# EAGLE board Keyboard (EAGLE 9.4.2)
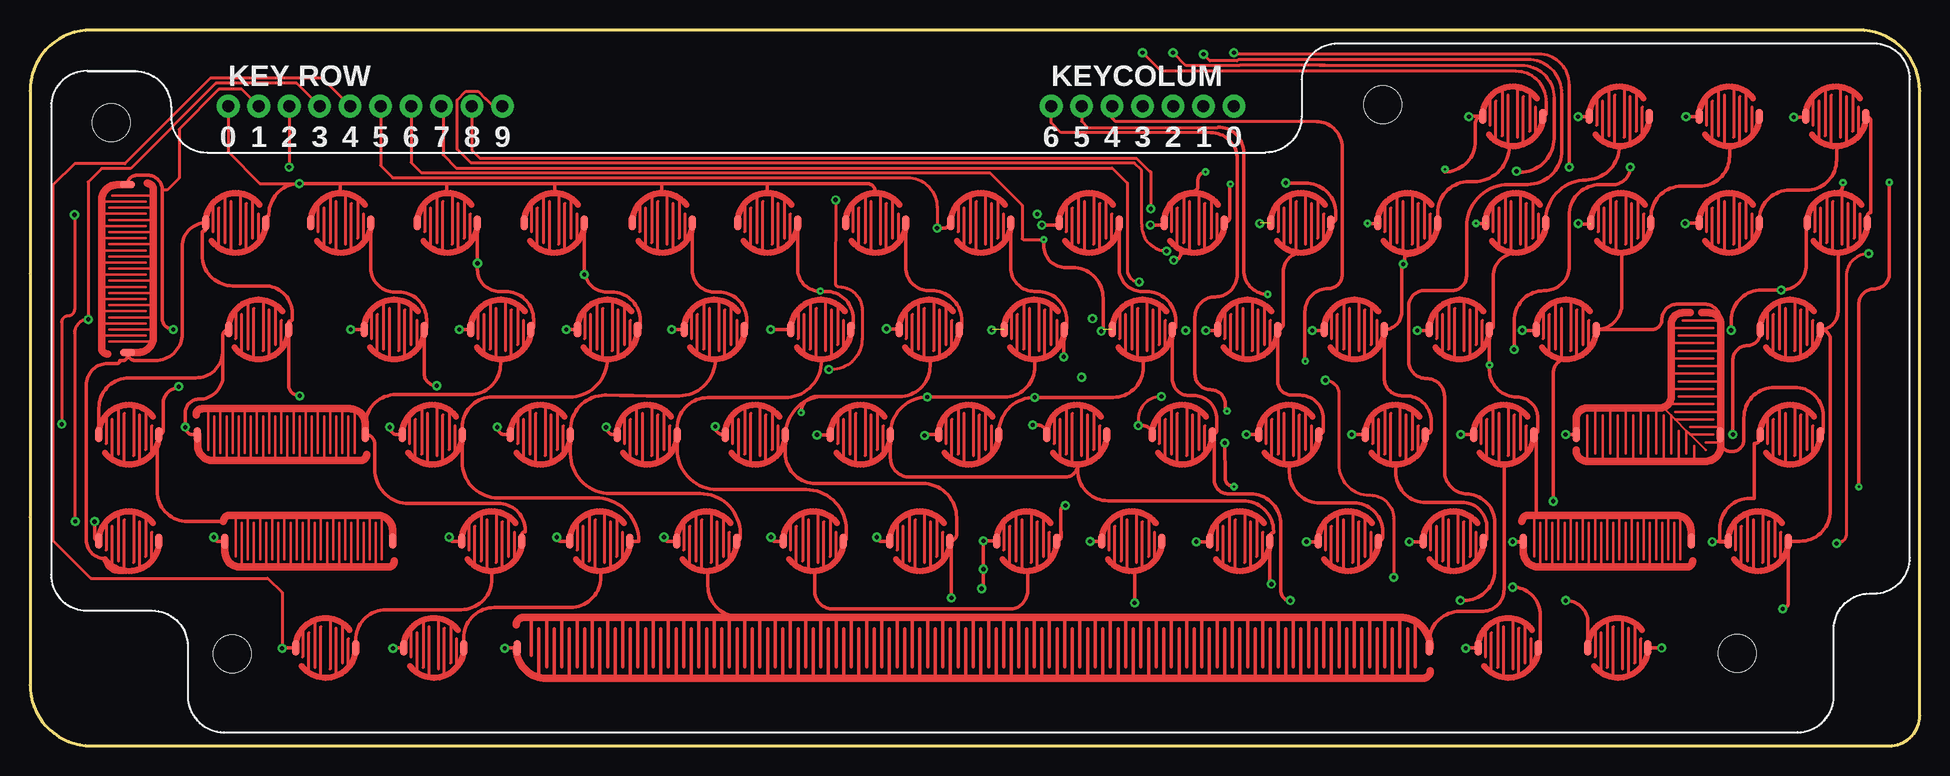
[diagram p0: board, top side]
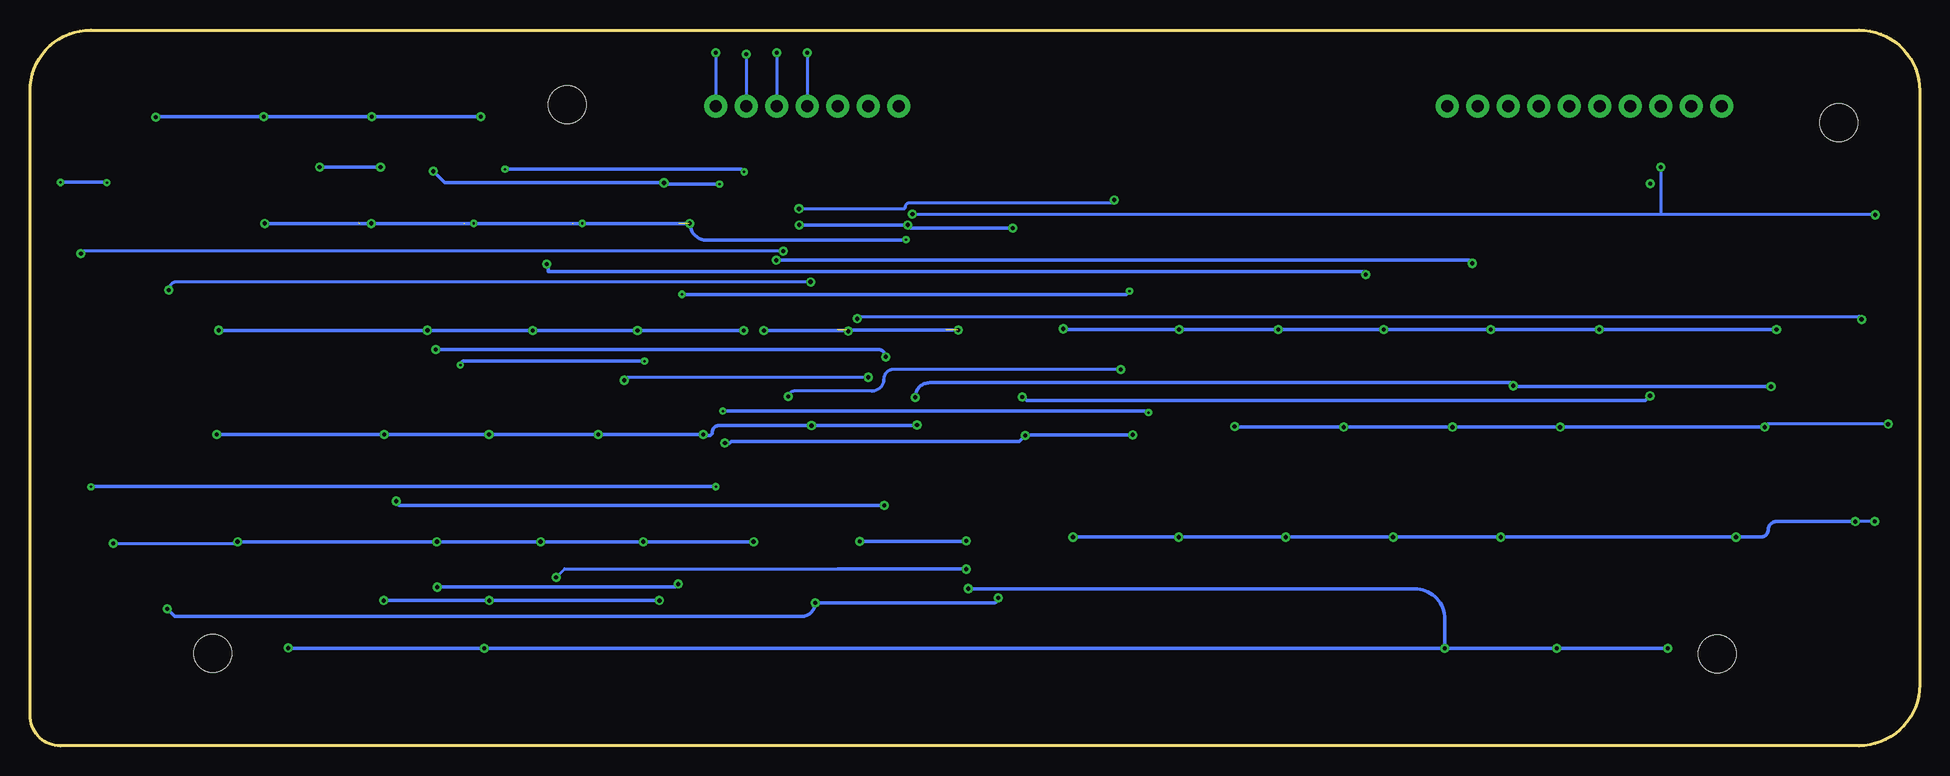
[diagram p1: board, bottom side, seen from below]

Size 157.48 x 59.69 mm. Coordinates in mm from the lower left corner, seen from the top.
Outline: 0,19.05 0,5.08 arc90 5.08,0 154.94,0 arc90 157.48,2.54 157.48,54.61 arc90 152.4,59.69 5.08,59.69 arc90 0,54.61 0,39.37 0,19.05
Copper layers (1*16): Top 0.035mm / dielectric 1.5mm / Bottom 0.035mm
Design rules "default": minimum track width 6mil, minimum drill 0.35mm, track to track 6mil, track to pad 6mil, pad to pad 6mil, via to via 6mil, smd to smd 6mil, copper to edge 40mil, drill to drill 6mil, minimum pad ring 10mil, minimum via ring 8mil, stop-mask expansion 4mil, vias tented up to drill 0mil, thermal gap 10mil
Holes 3.15 mm at 112.72,53.48 142.26,7.7 16.87,7.69 6.75,51.98

## Footprints (pad centres in the part's own frame; a part is rotated, then mirrored left to right if it is on the bottom)
SILICONE_SWITCH = smd 0.635 x 1.27: P$1 -2.5,0; P$2 2.5,0
SILICONE_SWITCH_2U = smd 0.635 x 1.27: P$1 -7,0; P$2 7,0
SILICONE_RETURN = smd 0.635 x 1.27: P$1 -6,0; P$2 6,0
SILICONE_SPACE = smd 0.635 x 1.27: P$1 -38,0; P$2 38,0

## Placement (x,y rotation side)
K-1  1U_PAD  [SILICONE_SWITCH]  25.9,43.6 0 top
K-2  1U_PAD  [SILICONE_SWITCH]  34.79,43.6 0 top
K-5  1U_PAD  [SILICONE_SWITCH]  61.46,43.6 0 top
K_0  1U_PAD  [SILICONE_SWITCH]  105.91,43.6 0 top
K_3  1U_PAD  [SILICONE_SWITCH]  43.68,43.6 0 top
K_4  1U_PAD  [SILICONE_SWITCH]  52.7,43.6 0 top
K_6  1U_PAD  [SILICONE_SWITCH]  70.48,43.6 0 top
K_7  1U_PAD  [SILICONE_SWITCH]  79.24,43.6 0 top
K_8  1U_PAD  [SILICONE_SWITCH]  88.26,43.6 0 top
K_9  1U_PAD  [SILICONE_SWITCH]  97.02,43.6 0 top
K_<  1U_PAD  [SILICONE_SWITCH]  100.83,17.06 0 top
K_>  1U_PAD  [SILICONE_SWITCH]  109.85,17.06 0 top
K_?  1U_PAD  [SILICONE_SWITCH]  118.61,17.06 0 top
K_A  1U_PAD  [SILICONE_SWITCH]  33.52,25.95 0 top
K_B  1U_PAD  [SILICONE_SWITCH]  74.16,17.06 0 top
K_BACK  1U_PAD  [SILICONE_SWITCH]  141.6,43.6 0 top
K_BREAK  1U_PAD  [SILICONE_SWITCH]  150.61,43.6 0 top
K_C  1U_PAD  [SILICONE_SWITCH]  56.38,17.06 0 top
K_CAPS  1U_PAD  [SILICONE_SWITCH]  8.25,25.95 0 top
K_CONTROL  2U_PAD  [SILICONE_SWITCH_2U]  20.95,25.95 0 top
K_D  1U_PAD  [SILICONE_SWITCH]  51.43,25.95 0 top
K_DEL  1U_PAD  [SILICONE_SWITCH]  146.68,34.71 0 top
K_DOWN  1U_PAD  [SILICONE_SWITCH]  132.45,52.49 0 top
K_E  1U_PAD  [SILICONE_SWITCH]  48.12,34.71 0 top
K_ESC  1U_PAD  [SILICONE_SWITCH]  17.14,43.6 180 top
K_F  1U_PAD  [SILICONE_SWITCH]  60.44,25.95 0 top
K_G  1U_PAD  [SILICONE_SWITCH]  69.21,25.95 0 top
K_H  1U_PAD  [SILICONE_SWITCH]  78.22,25.95 0 top
K_I  1U_PAD  [SILICONE_SWITCH]  92.7,34.71 0 top
K_J  1U_PAD  [SILICONE_SWITCH]  87.24,25.95 0 top
K_K  1U_PAD  [SILICONE_SWITCH]  96,25.95 0 top
K_L  1U_PAD  [SILICONE_SWITCH]  104.89,25.95 0 top
K_LEFT  1U_PAD  [SILICONE_SWITCH]  123.56,52.49 0 top
K_LEFTALT  1U_PAD  [SILICONE_SWITCH]  33.65,8.17 0 top
K_LEFTMETA  1U_PAD  [SILICONE_SWITCH]  24.63,8.17 0 top
K_LINE  1U_PAD  [SILICONE_SWITCH]  144.01,17.06 0 top
K_LSHIFT  2U_PAD  [SILICONE_SWITCH_2U]  23.23,17.06 0 top
K_M  1U_PAD  [SILICONE_SWITCH]  91.81,17.06 0 top
K_N  1U_PAD  [SILICONE_SWITCH]  83.05,17.06 0 top
K_NOSCL  1U_PAD  [SILICONE_SWITCH]  8.25,17.06 0 top
K_O  1U_PAD  [SILICONE_SWITCH]  101.47,34.71 0 top
K_P  1U_PAD  [SILICONE_SWITCH]  110.36,34.71 0 top
K_PIPE  1U_PAD  [SILICONE_SWITCH]  146.68,25.95 0 top
K_PLUS  1U_PAD  [SILICONE_SWITCH]  123.82,43.6 0 top
K_Q  1U_PAD  [SILICONE_SWITCH]  30.35,34.71 0 top
K_QUOTE  1U_PAD  [SILICONE_SWITCH]  122.8,25.95 0 top
K_R  1U_PAD  [SILICONE_SWITCH]  57.02,34.71 0 top
K_RETURN  RETURN_PAD  [SILICONE_RETURN]  134.87,25.95 0 top
K_RIGHT  1U_PAD  [SILICONE_SWITCH]  150.49,52.49 0 top
K_RIGHTALT  1U_PAD  [SILICONE_SWITCH]  123.18,8.17 0 top
K_RIGHTMETA  1U_PAD  [SILICONE_SWITCH]  132.33,8.17 180 top
K_RSHIFT  2U_PAD  [SILICONE_SWITCH_2U]  131.44,17.06 0 top
K_S  1U_PAD  [SILICONE_SWITCH]  42.54,25.95 0 top
K_SEMI  1U_PAD  [SILICONE_SWITCH]  113.78,25.95 0 top
K_SETUP  2U_PAD  [SILICONE_SWITCH_2U]  8.12,39.79 270 top
K_SPACE  SPACE_PAD  [SILICONE_SPACE]  78.61,8.17 0 top
K_T  1U_PAD  [SILICONE_SWITCH]  65.91,34.71 0 top
K_TAB  1U_PAD  [SILICONE_SWITCH]  19.04,34.71 0 top
K_TILDE  1U_PAD  [SILICONE_SWITCH]  132.58,43.6 0 top
K_U  1U_PAD  [SILICONE_SWITCH]  83.69,34.71 0 top
K_UP  1U_PAD  [SILICONE_SWITCH]  141.6,52.49 0 top
K_USCORE  1U_PAD  [SILICONE_SWITCH]  114.8,43.6 0 top
K_V  1U_PAD  [SILICONE_SWITCH]  65.27,17.06 0 top
K_W  1U_PAD  [SILICONE_SWITCH]  39.23,34.71 0 top
K_X  1U_PAD  [SILICONE_SWITCH]  47.49,17.06 0 top
K_Y  1U_PAD  [SILICONE_SWITCH]  74.92,34.71 0 top
K_Z  1U_PAD  [SILICONE_SWITCH]  38.47,17.06 0 top
K_{  1U_PAD  [SILICONE_SWITCH]  119.12,34.71 0 top
K_}  1U_PAD  [SILICONE_SWITCH]  128.01,34.71 0 top

## Library data of the parts
K-1 K-2 K-5 K_0 K_3 K_4 K_6-K_9 K_< K_> K_? K_A K_B K_BACK K_BREAK K_C K_CAPS K_CONTROL K_D K_DEL K_DOWN K_E K_ESC K_F K_G K_H K_I K_J K_K K_L K_LEFT K_LEFTALT K_LEFTMETA K_LINE K_LSHIFT K_M K_N K_NOSCL K_O K_P K_PIPE K_PLUS K_Q K_QUOTE K_R K_RETURN K_RIGHT K_RIGHTALT K_RIGHTMETA K_RSHIFT K_S K_SEMI K_SETUP K_SPACE K_T K_TAB K_TILDE K_U K_UP K_USCORE K_V K_W K_X K_Y K_Z K_{ K_} = SiliconeSwitches

## Nets
KEYCOLUM0: K_7.P$2 K_<.P$2 K_ESC.P$2 K_G.P$2 K_J.P$2 K_NOSCL.P$2 K_RIGHTALT.P$2 K_SETUP.P$2 K_TAB.P$2 K_U.P$2
KEYCOLUM1: K-1.P$2 K_8.P$2 K_CAPS.P$2 K_H.P$2 K_I.P$2 K_K.P$2 K_LSHIFT.P$2 K_Q.P$2 K_RIGHTMETA.P$2
KEYCOLUM2: K-2.P$2 K_0.P$2 K_9.P$2 K_>.P$2 K_CONTROL.P$2 K_L.P$2 K_LEFTMETA.P$2 K_O.P$2 K_W.P$2 K_Z.P$2
KEYCOLUM3: K_3.P$2 K_?.P$2 K_A.P$2 K_E.P$2 K_LEFT.P$2 K_LEFTALT.P$2 K_P.P$2 K_SEMI.P$2 K_USCORE.P$2 K_X.P$2
KEYCOLUM4: K_4.P$2 K_C.P$2 K_DOWN.P$2 K_PLUS.P$2 K_QUOTE.P$2 K_R.P$2 K_RSHIFT.P$2 K_S.P$2 K_SPACE.P$2 K_{.P$2
KEYCOLUM5: K-5.P$2 K_D.P$2 K_N.P$2 K_PIPE.P$2 K_RETURN.P$2 K_T.P$2 K_TILDE.P$2 K_UP.P$2 K_V.P$2 K_}.P$2
KEYCOLUM6: K_6.P$2 K_B.P$2 K_BACK.P$2 K_BREAK.P$2 K_DEL.P$2 K_F.P$2 K_LINE.P$2 K_M.P$2 K_RIGHT.P$2 K_Y.P$2
KEYROW0: K-1.P$1 K-2.P$1 K-5.P$1 K_3.P$1 K_4.P$1 K_6.P$1 K_ESC.P$1
KEYROW1: K_E.P$1 K_Q.P$1 K_R.P$1 K_SETUP.P$1 K_T.P$1 K_W.P$1 K_Y.P$1
KEYROW2: K_A.P$1 K_CAPS.P$1 K_CONTROL.P$1 K_D.P$1 K_F.P$1 K_S.P$1 K_TAB.P$1
KEYROW3: K_B.P$1 K_C.P$1 K_LSHIFT.P$1 K_NOSCL.P$1 K_V.P$1 K_X.P$1 K_Z.P$1
KEYROW4: K_LEFTALT.P$1 K_LEFTMETA.P$1 K_M.P$1 K_N.P$1 K_RIGHTALT.P$1 K_RIGHTMETA.P$1 K_SPACE.P$1
KEYROW5: K_7.P$1 K_8.P$1 K_9.P$1 K_DOWN.P$1 K_LEFT.P$1 K_RIGHT.P$1 K_UP.P$1
KEYROW6: K_0.P$1 K_BACK.P$1 K_I.P$1 K_PLUS.P$1 K_TILDE.P$1 K_U.P$1 K_USCORE.P$1
KEYROW7: K_BREAK.P$1 K_G.P$1 K_H.P$1 K_O.P$1 K_P.P$1 K_{.P$1 K_}.P$1
KEYROW8: K_DEL.P$1 K_J.P$1 K_K.P$1 K_L.P$1 K_QUOTE.P$1 K_RETURN.P$1 K_SEMI.P$1
KEYROW9: K_<.P$1 K_>.P$1 K_?.P$1 K_LINE.P$1 K_PIPE.P$1 K_RSHIFT.P$1

## Tracks (layer width: path | path; a pad name or v marks a point on that pad's centre or on a via)
KEYCOLUM0  (via drill 0.35, 1 pad 1.91)
  Top 0.254: 128.27,55.14 arc90 125.73,57.68 100.43,57.68 v100.33,57.78
  Top 0.305: K_TAB.P$2 21.54,35.26 arc-90 21.72,35.43 arc90 21.84,35.56 21.84,36.07 arc90 19.56,38.35 16.89,38.35 arc-90 14.35,40.89 14.35,42.8 arc-90 14.48,42.93 arc90 14.64,43.09 K_ESC.P$2 arc90 12.7,41.66 12.7,34.39 arc-90 10.44,32.13 8.78,32.13 arc-90 K_SETUP.P$2 8.12,32.5 arc-90 7.75,32.13 7.49,32.13 arc-90 7.24,31.88 6.48,31.88 arc90 4.7,30.1 4.7,17.14 arc90 6.22,15.62 | K_TAB.P$2 21.54,34.62 arc-90 19.05,32.13 | 6.22,15.62 6.3,15.47 | K_NOSCL.P$2 10.75,16.87 arc-90 8.41,14.53 7.87,14.53 arc90 7.82,14.48 7.37,14.48 arc-90 6.22,15.62 | K_7.P$2 81.74,39.85 arc90 83.69,37.9 83.95,37.9 arc-90 86.41,35.43 86.41,34.94 arc-90 K_U.P$2 | K_U.P$2 86.19,34.67 arc-90 83.74,32.23 83.74,31.62 arc-90 81.2,29.08 v74.78,29.08 arc90 71.71,26.01 K_G.P$2 71.71,24 arc90 73.3,22.4 86.26,22.4 arc90 87.3,23.44 | 87.3,23.44 87.3,22.97 arc90 89.84,20.43 101.09,20.43 arc-90 103.63,17.89 103.63,17.78 arc90 103.33,17.48 K_<.P$2 103.33,13.61 v103.45,13.49 | 87.3,23.44 arc90 89.74,25.89 K_J.P$2 | v123.55,13.23 arc-90 125.86,10.92 125.86,8.34 arc-90 K_RIGHTALT.P$2 125.68,8.15 arc-90 123.14,5.61 | K_TAB.P$2 21.54,30.12 arc90 v22.48,29.18 | 128.27,55.14 v128.27,48.26 | v133.35,48.26 arc-90 131.88,46.79 130.81,46.79 arc90 128.27,44.25 128.27,40.01 arc-90 126.21,37.95 126.16,37.95 arc90 123.67,35.46 v123.67,33.05 | v86.16,32.44 86.16,34.68 arc-90 K_U.P$2
  Bottom 0.254: v100.33,57.78 v100.33,53.34
  Bottom 0.305: v103.45,13.49 103.71,13.23 v123.55,13.23 | v22.48,29.18 22.86,28.8 74.42,28.8 74.7,29.08 arc-90 v74.78,29.08 | v128.27,48.26 v133.35,48.26 | v123.67,33.05 86.77,33.05 arc90 v86.16,32.44
KEYCOLUM1  (via drill 0.35, 1 pad 1.91)
  Top 0.254: 127.66,54.38 arc90 124.82,57.23 100.7,57.23 100.6,57.13 98.32,57.13 v97.79,57.66
  Top 0.305: K_LSHIFT.P$2 30.23,17.93 arc90 30.23,17.93 30.23,18.03 arc90 29.01,19.25 16.66,19.25 arc90 16.1,18.69 13.13,18.69 arc-90 10.59,21.23 10.59,25.79 arc-90 K_CAPS.P$2 arc90 11.1,26.3 11.1,28.55 arc-90 12.39,29.84 v12.39,29.95 | K-1.P$2 28.4,39.85 arc90 30.4,37.85 30.73,37.85 arc-90 33.04,35.53 33.04,34.91 arc-90 K_Q.P$2 32.84,31.06 arc90 v33.88,30.02 | K_8.P$2 90.76,39.82 arc90 92.71,37.87 93.04,37.87 arc-90 95.48,35.43 95.48,34.99 arc-90 K_I.P$2 95.2,34.65 | 95.2,34.65 arc-90 92.79,32.23 92.79,31.57 arc-90 90.27,29.06 v83.72,29.06 arc90 80.72,26.06 K_H.P$2 | 95.2,34.65 95.2,30.58 arc90 96.57,29.21 96.95,29.21 arc-90 98.91,27.25 98.91,26.35 arc-90 K_K.P$2 arc-90 98.68,25.77 98.68,22.2 arc90 99.87,21.01 101.7,21.01 arc-90 104.24,18.47 104.24,12.9 arc90 v105.03,12.11 | 129.83,8.87 K_RIGHTMETA.P$2 129.83,10.28 arc90 v127.99,12.11 | 127.66,54.38 127.66,49.66 arc-90 124.82,46.81 123.24,46.81 arc90 119.71,43.28 119.71,39.17 arc-90 118.52,37.97 116.23,37.97 arc90 114.88,36.63 114.88,32.11 arc90 116.36,30.63 arc-90 117.88,29.11 117.88,22.91 arc90 119.79,21.01 119.66,21.01 arc-90 122.07,18.59 122.07,14.65 arc-90 119.53,12.11 v119.2,12.11
  Bottom 0.254: v97.79,57.66 v97.79,53.34
  Bottom 0.305: v105.03,12.11 v119.2,12.11 v127.99,12.11 | v83.72,29.06 arc90 82.5,30.28 34.14,30.28 v33.88,30.02 arc-90 33.81,29.95 v12.39,29.95
KEYCOLUM2  (via drill 0.2, 0.35, 1 pad 1.91)
  Top 0.254: 127,54.05 arc90 124.31,56.74 107.95,56.74 | 107.47,56.74 107.95,56.74 | 107.95,56.74 100.79,56.74 100.77,56.72 96.31,56.72 v95.25,57.78
  Top 0.305: K_LEFTMETA.P$2 27.13,8.81 arc-90 29.67,11.35 35.94,11.35 arc90 38.48,13.89 38.48,14.58 38.49,14.58 arc90 K_Z.P$2 40.97,17.55 arc-90 41.27,17.86 41.27,17.97 arc90 39.04,20.21 31.57,20.21 arc-90 28.73,23.05 28.73,25.17 arc90 K_CONTROL.P$2 27.95,26.75 arc-90 30.49,29.29 36.68,29.29 arc90 39.22,31.83 39.22,32.26 39.28,32.26 arc90 K_W.P$2 arc90 41.96,34.94 41.96,35.56 arc90 39.65,37.87 39.14,37.87 arc-90 37.29,39.72 v37.29,40.23 K-2.P$2 | 105.97,41.1 arc90 108.41,43.54 | 108.41,43.54 K_0.P$2 arc90 108.81,44.01 108.81,44.4 arc90 106.27,46.94 v104.65,46.94 | 108.41,43.54 arc-90 105.97,41.1 | K_>.P$2 arc90 112.72,17.44 112.72,17.86 arc90 110.34,20.24 107.49,20.24 arc-90 104.95,22.78 104.95,23.42 arc90 107.39,25.86 K_L.P$2 arc90 107.77,26.33 107.77,27.3 arc90 105.84,29.23 105.16,29.23 arc-90 103.97,30.43 K_O.P$2 arc90 104.44,35.19 104.44,39.57 arc-90 105.97,41.1 | v95.3,40.49 arc90 95.91,41.1 97.1,41.1 arc90 99.56,43.56 arc-90 K_9.P$2 arc90 99.97,44.05 99.97,46.79 arc-90 v100.02,46.84 | v123.88,47.9 123.95,47.83 124.18,47.83 arc90 127,50.65 127,54.05
  Bottom 0.254: v95.25,57.78 v95.25,53.34
  Bottom 0.305: v95.3,40.49 37.54,40.49 v37.29,40.23 | v123.88,47.9 122.94,46.97 104.67,46.97 v104.65,46.94 arc-90 104.55,46.84 v100.02,46.84
KEYCOLUM3  (via drill 0.35, 1 pad 1.91)
  Top 0.254: 126.37,53.72 arc90 123.85,56.24 94.26,56.24 v92.71,57.78
  Top 0.305: K_LEFTALT.P$2 36.15,8.99 arc-90 38.69,11.53 45.03,11.53 arc90 47.57,14.07 47.57,14.55 arc90 49.99,16.97 K_X.P$2 50.73,17.06 arc90 47.12,20.68 38.99,20.68 arc-90 36.02,23.65 K_A.P$2 36.02,26.54 arc-90 38.56,29.08 44.93,29.08 arc90 48.11,32.26 48.17,32.26 arc90 K_E.P$2 arc90 50.85,34.94 50.85,35.48 arc90 48.49,37.85 48.08,37.85 arc-90 46.18,39.75 K_3.P$2 v46.18,39.3 | K_?.P$2 arc90 121.41,17.36 121.41,18.21 arc90 119.33,20.3 116.33,20.3 arc-90 113.79,22.84 113.79,23.47 113.81,23.47 arc90 K_SEMI.P$2 arc90 116.76,26.43 116.76,27.08 arc90 114.66,29.18 114.33,29.18 arc-90 112.86,30.66 K_P.P$2 arc90 114.3,36.16 114.3,40.03 v114.43,40.16 114.58,40.16 114.58,40.87 arc90 117.3,43.59 K_USCORE.P$2 117.3,44.42 arc-90 119.92,47.04 120.32,47.04 arc90 123.27,49.99 123.57,49.99 arc90 126.06,52.48 K_LEFT.P$2 arc90 126.37,52.79 126.37,53.72
  Bottom 0.254: v92.71,57.78 v92.71,53.34
  Bottom 0.305: v46.18,39.3 46.43,39.55 114.3,39.55 114.3,40.03 v114.43,40.16
KEYCOLUM4  (via drill 0.2, 1 pad 1.91)
  Top 0.254: 107.21,52.05 90.45,52.05 90.17,52.32 v90.17,53.34
  Top 0.305: K_4.P$2 55.2,39.65 arc90 57,37.85 57.38,37.85 arc-90 59.74,35.48 59.74,34.94 arc-90 K_R.P$2 59.52,34.62 arc-90 57.1,32.21 57.1,32.18 arc-90 54.1,29.18 51.41,29.18 arc-2 48.03,29.23 47.91,29.23 arc90 45.04,26.36 K_S.P$2 45.04,24.36 arc90 48.36,21.03 55.85,21.03 arc-90 59.18,17.7 59.18,17.36 arc-90 K_C.P$2 58.88,16.97 arc-90 56.49,14.58 56.49,13.34 arc90 59.03,10.79 114.3,10.79 arc-90 116.61,8.49 K_SPACE.P$2 116.61,8.66 arc-90 119.14,11.2 120.98,11.2 arc90 122.83,13.06 122.83,23.29 arc-90 122.94,23.39 arc90 125.3,25.76 K_QUOTE.P$2 | K_DOWN.P$2 arc-90 132.47,50.01 132.46,50.01 arc-90 129.64,47.19 129.69,47.19 arc90 126.32,43.81 K_PLUS.P$2 126.32,43.54 arc-90 123.88,41.1 arc90 121.94,39.17 121.94,35.04 arc-90 K_{.P$2 v121.62,31.75 121.62,31.37 arc90 123.9,29.08 arc-90 125.65,27.33 125.65,26.3 arc-90 K_QUOTE.P$2 | K_RSHIFT.P$2 138.44,18 arc90 137.19,19.25 125.6,19.25 arc-90 125.53,19.33 125.53,25.72 arc90 K_QUOTE.P$2 | 107.21,52.05 arc-90 109.35,49.91 109.35,39.29 arc-90 108.18,38.12 arc90 106.25,36.2 106.25,32.11 arc90 v106.27,32.08
  Bottom 0.305: v106.27,32.08 121.29,32.08 arc-90 v121.62,31.75
KEYCOLUM5  (via drill 0.2, 0.35, 1 pad 1.91)
  Top 0.254: v87.63,53.34 87.63,52.07 88.14,51.56 98.98,51.56 99.01,51.59
  Top 0.305: K-5.P$2 63.96,39.8 arc90 65.86,37.9 | 65.86,37.9 66.32,37.9 arc-90 68.61,35.61 68.61,34.91 arc-90 K_T.P$2 68.41,34.7 arc-90 65.96,32.26 65.96,32.11 arc-90 62.89,29.03 56.47,29.03 arc90 53.93,26.49 K_D.P$2 53.93,24.71 arc90 57.28,21.36 64.67,21.36 arc-90 68.02,18.01 68.02,17.31 arc-90 K_V.P$2 67.77,17 arc-90 65.38,14.61 65.38,12.95 arc90 66.93,11.4 81.64,11.4 arc90 83.13,12.9 83.13,14.48 arc-90 83.19,14.53 arc90 85.55,16.89 K_N.P$2 | K_}.P$2 arc90 132.66,36.87 132.66,41.15 arc90 135.08,43.56 K_TILDE.P$2 135.08,44.12 arc-90 137.62,46.66 139.12,46.66 arc90 141.63,49.17 141.63,50.01 arc90 144.1,52.48 K_UP.P$2 | K_N.P$2 arc90 85.93,17.44 85.93,17.86 | 146.76,23.52 arc90 149.18,25.94 K_PIPE.P$2 arc90 149.43,26.2 149.43,27.53 arc90 147.07,29.9 145.36,29.9 arc90 142.82,27.36 142.82,25.53 arc-90 141.83,24.54 141.78,24.54 arc-90 140.87,25.45 K_RETURN.P$2 | K_RETURN.P$2 arc-90 K_RETURN.P$2 140.87,24.89 | K_RETURN.P$2 140.87,35.51 arc90 139.55,36.83 137.29,36.83 arc90 135.99,35.53 arc-90 135.17,34.71 K_}.P$2 | K_N.P$2 arc90 85.9,17.41 85.9,19.66 arc-90 v86.28,20.04 | v126.95,20.4 126.95,31.11 arc-90 128.07,32.23 arc90 130.51,34.67 K_}.P$2 | 99.01,51.59 arc-90 101.14,49.45 101.14,39.65 arc90 v103.15,37.64 | v65.86,37.92 65.86,37.9
  Bottom 0.305: v86.28,20.04 126.59,20.04 arc90 v126.95,20.4 | v65.86,37.92 66.14,37.64 v103.15,37.64
KEYCOLUM6  (via drill 0.2, 0.35, 1 pad 1.91)
  Top 0.254: 98.4,51.13 85.9,51.13 85.09,51.94 v85.09,53.34
  Top 0.305: K_6.P$2 72.98,39.88 arc90 74.88,37.97 75.11,37.97 arc-90 77.65,35.43 77.65,34.94 arc-90 K_Y.P$2 77.42,34.62 arc-90 75.01,32.21 75.01,31.67 arc-90 72.47,29.13 66.17,29.13 | 66.17,29.13 arc90 62.98,25.95 K_F.P$2 62.94,24.41 arc90 65.48,21.87 74.37,21.87 arc-90 77.22,19.02 77.22,17.61 arc-90 K_B.P$2 arc-90 76.78,16.93 v76.78,12.34 | K_BACK.P$2 144.1,43.79 arc-90 146.64,46.33 148.03,46.33 arc90 150.55,48.84 150.55,49.96 arc90 152.99,52.4 K_RIGHT.P$2 arc-90 153.42,52.06 153.42,44.48 arc90 153.11,44.17 K_BREAK.P$2 153.11,43.49 arc-90 150.67,41.05 150.67,36.21 arc-90 K_DEL.P$2 arc-90 150.04,33.85 150.04,19.6 arc-90 147.5,17.06 K_LINE.P$2 146.51,11.89 arc-90 v146.05,11.43 | v92.05,11.91 92.05,14.4 arc90 91.92,14.53 arc90 94.31,16.92 K_M.P$2 | 98.4,51.13 arc-90 100.61,48.92 100.61,39.29 arc-90 98.75,37.44 arc90 97.08,35.76 97.08,30.99 arc90 98.37,29.69 arc-90 99.62,28.45 99.62,28.04 v99.75,27.91 | v64.26,27.79 arc-90 65.61,29.13 66.17,29.13
  Bottom 0.305: v146.05,11.43 145.41,10.79 93.17,10.79 arc-90 v92.05,11.91 77.22,11.91 arc-90 v76.78,12.34 | v99.75,27.91 64.39,27.91 v64.26,27.79
KEYROW0  (via drill 0.35, 1 pad 1.91)
  Top 0.254: v16.51,53.34 16.51,49.53 19.15,46.89 v22.45,46.89
  Top 0.305: K_ESC.P$1 19.64,43.92 arc-90 19.91,44.2 19.91,44.35 arc-90 v22.45,46.89 25.78,46.89 | K_6.P$1 67.98,43.67 arc-90 70.46,46.15 arc90 69.72,46.89 61.39,46.89 | 25.78,46.89 34.62,46.89 | 34.62,46.89 38.1,46.89 42.77,46.89 43.71,46.89 | 43.71,46.89 52.65,46.89 | 52.65,46.89 61.39,46.89 | K-5.P$1 58.96,43.62 arc-90 61.42,46.08 61.42,46.86 arc90 61.39,46.89 | K_4.P$1 50.2,43.64 arc-90 52.65,46.1 52.65,46.89 | K_3.P$1 arc-90 43.63,46.05 43.69,46.05 arc90 43.71,46.08 43.71,46.89 | K-2.P$1 32.29,43.67 arc-90 34.72,46.1 34.72,46.79 arc90 34.62,46.89 | K-1.P$1 23.4,43.62 arc-90 25.86,46.08 25.86,46.81 arc90 25.78,46.89
KEYROW1  (via drill 0.35, 1 pad 1.91)
  Top 0.254: 11.02,46.35 11.43,46.35 12.42,47.35 12.42,51.41 15.75,54.74 17.65,54.74 v19.05,53.34
  Top 0.305: K_SETUP.P$1 arc-90 8.9,47.57 9.8,47.57 arc-90 11.02,46.35 11.02,35.64 arc90 v11.94,34.72 | v71.37,34.77 72.36,34.77 arc-90 K_Y.P$1 | K_T.P$1 61.73,34.71 arc-90 v61.72,34.72 | K_R.P$1 v53.48,34.71 arc-90 v53.47,34.72 | K_E.P$1 v44.69,34.71 arc-90 v44.68,34.72 | K_W.P$1 35.77,34.71 arc-90 v35.76,34.72 | K_Q.P$1 26.73,34.71 arc-90 v26.72,34.72
  Bottom 0.305: v11.94,34.72 v26.72,34.72 v35.76,34.72 v44.68,34.72 v53.47,34.72 v61.72,34.72 71.37,34.72 v71.37,34.77
KEYROW2  (via drill 0.35, 1 pad 1.91)
  Top 0.254: v3.71,44.27 3.71,36.4 arc-90 3.15,35.84 arc90 2.64,35.33 v2.64,26.82 | v21.59,53.34 v21.59,48.26
  Top 0.305: K_CAPS.P$1 5.75,28.18 arc-90 8.25,30.68 13.82,30.68 arc90 16.08,32.94 | 16.08,32.94 16.08,34.25 arc-90 K_TAB.P$1 | 13.55,25.95 arc-90 v12.93,26.57 | v12.93,26.57 12.93,27.74 arc-90 14.1,28.91 arc90 16.08,30.89 16.08,32.94 | K_CONTROL.P$1 13.55,25.95 | 13.55,25.95 arc-90 v12.93,26.57 | v57.1,26.62 arc90 57.77,25.95 K_F.P$1 | K_D.P$1 48.63,25.95 arc-90 v48.01,26.57 | K_S.P$1 39.56,25.95 arc-90 v38.94,26.57 | K_A.P$1 30.59,25.95 arc-90 v29.97,26.57
  Bottom 0.254: v83.94,44.34 21.59,44.34 | 21.59,44.34 3.77,44.34 arc90 v3.71,44.27 | v2.64,26.82 12.67,26.82 arc-90 v12.93,26.57 | v21.59,48.26 21.59,44.34
  Bottom 0.305: v12.93,26.57 v29.97,26.57 v38.94,26.57 v48.01,26.57 57.1,26.57 arc90 57.12,26.59 arc90 v57.1,26.62
KEYROW3  (via drill 0.35, 1 pad 1.91)
  Top 0.254: v3.76,18.72 arc-90 3.71,18.77 3.71,34.42 arc-90 v4.85,35.56 4.85,47.02 5.97,48.13 8.38,48.13 15.49,55.24 22.23,55.24 v24.13,53.34
  Top 0.305: K_NOSCL.P$1 arc-90 5.38,17.42 v5.38,18.69 | v70.56,17.4 arc90 70.9,17.06 K_B.P$1 | K_V.P$1 62.09,17.06 arc-90 v61.75,17.4 | K_C.P$1 53.17,17.06 arc-90 v52.83,17.4 | K_X.P$1 44.23,17.06 arc-90 v43.89,17.4 | K_Z.P$1 35.27,17.06 arc-90 v34.92,17.4 | K_LSHIFT.P$1 15.66,17.06 arc-90 v15.32,17.4
  Bottom 0.254: v88.54,35.61 88.34,35.81 5.1,35.81 arc90 v4.85,35.56 | v3.76,18.72 5.36,18.72 arc-90 v5.38,18.69
  Bottom 0.305: v5.38,18.69 11.96,18.69 arc-90 12.62,18.03 arc90 13.26,17.4 v15.32,17.4 v34.92,17.4 v43.89,17.4 v52.83,17.4 v61.75,17.4 v70.56,17.4
KEYROW4  (via drill 0.35, 1 pad 1.91)
  Top 0.254: v107.95,30.48 arc-90 109.07,29.36 109.07,23.44 arc90 111.61,20.9 111.68,20.9 arc-90 113.64,18.95 v113.64,14.05 | v26.67,53.34 24.36,55.65 15.01,55.65 7.9,48.54 3.71,48.54 1.9,46.74 1.9,17.14 5.08,13.97 19.81,13.97 21.01,12.78 v21.01,8.13
  Top 0.305: K_LEFTMETA.P$1 21.05,8.17 arc90 v21.01,8.13 | v135.97,8.15 134.84,8.15 arc-90 K_RIGHTMETA.P$1 | K_RIGHTALT.P$1 119.67,8.17 arc90 v119.63,8.13 | K_LEFTALT.P$1 30.29,8.17 arc90 v30.25,8.13 | K_SPACE.P$1 39.61,8.17 arc90 v39.57,8.13 | K_M.P$1 88.36,17.06 arc90 v88.34,17.04 | K_N.P$1 arc90 80.51,17.09 v79.45,17.09 v79.45,14.73 79.45,13.26 arc-90 v79.3,13.11
  Bottom 0.254: v107.95,30.48 107.7,30.73 v87.63,30.73 | v113.64,14.05 112.93,14.76 90.17,14.76 89.99,14.76
  Bottom 0.305: v21.01,8.13 v30.25,8.13 v39.57,8.13 | v39.57,8.13 v119.63,8.13 135.97,8.13 v135.97,8.15 | v79.45,17.09 arc90 79.5,17.04 v88.34,17.04 | v79.3,13.11 42.11,13.11 arc90 39.57,10.57 v39.57,8.13 | 90.17,14.76 79.48,14.76 v79.45,14.73
KEYROW5  (via drill 0.2, 0.35, 1 pad 1.91)
  Top 0.254: v75.59,43.18 75.59,44.91 arc90 73.13,47.37 30.23,47.37 29.21,48.39 v29.21,53.34
  Top 0.305: K_7.P$1 76.32,43.18 v75.59,43.18 | v93.37,43.43 94.35,43.43 K_9.P$1 94.52,43.87 arc-90 96.85,46.2 arc90 97.33,46.69 97.33,47.22 arc-90 v97.97,47.85 | K_8.P$1 85.59,43.43 v84.33,43.43 | v119.91,52.45 arc-90 119.95,52.49 K_LEFT.P$1 arc90 120.45,51.88 120.45,50.39 arc-90 117.91,47.85 v117.91,48.08 | v146.99,52.43 147.92,52.43 arc90 K_RIGHT.P$1 | K_UP.P$1 arc-90 139.06,52.45 v138,52.45 | K_DOWN.P$1 arc-90 129.91,52.45 v129.01,52.45
  Bottom 0.305: v75.59,43.18 84.07,43.18 v84.33,43.43 93.32,43.43 93.34,43.46 v93.37,43.43 | v119.91,52.45 v129.01,52.45 v138,52.45 146.99,52.45 v146.99,52.43 | v97.97,47.85 98.19,48.08 v117.91,48.08
KEYROW6  (via drill 0.2, 0.35, 1 pad 1.91)  (6 unrouted)
  Top 0.254: v31.75,53.34 31.75,48.64 32.61,47.78 79.99,47.78 82.68,45.09 82.68,42.29 82.75,42.22 v84.48,42.22
  Top 0.305: 80.18,34.71 arc90 v80.14,34.67 | v89.28,34.57 arc-90 89.42,34.71 89.42,37.34 arc90 86.88,39.88 86.31,39.88 arc-90 84.48,41.71 v84.48,42.22 | 129.96,43.48 129.11,43.48 arc-90 v129.03,43.56 | v102.49,43.56 arc-90 102.53,43.6 | 96.34,34.65 arc-90 v96.32,34.62 | 121.28,43.56 v120.5,43.56 | 112.26,43.56 v111.45,43.56 | K_BACK.P$1 137.96,43.6 v137.92,43.56
  Bottom 0.305: v80.14,34.67 89.33,34.67 arc-90 89.36,34.65 arc-90 v89.28,34.57 arc-90 89.33,34.62 v96.32,34.62 | v84.48,42.22 84.53,42.16 101.09,42.16 arc90 v102.49,43.56 v111.45,43.56 v120.5,43.56 v129.03,43.56 v137.92,43.56
KEYROW7  (via drill 0.2, 0.35, 1 pad 1.91)
  Top 0.254: v92.43,38.68 arc-90 91.44,39.67 91.44,46.92 90.18,48.18 35.51,48.18 34.42,49.28 34.42,53.21 v34.29,53.34
  Top 0.305: K_G.P$1 arc-90 66.69,25.93 v65.58,25.93 | v74.55,25.88 arc-90 74.61,25.95 K_H.P$1 | K_O.P$1 arc-90 98.87,34.62 v97.99,34.62 97.89,34.62 | v124.36,34.65 125.44,34.65 arc90 K_}.P$1 | K_{.P$1 arc-90 116.53,34.62 v115.59,34.62 | K_P.P$1 arc-90 107.76,34.62 v106.86,34.62 | v141.76,34.65 141.76,35.46 arc-90 144.3,38 v145.92,38 arc90 148.03,40.11 148.03,43.52 | 148.03,43.52 arc-90 K_BREAK.P$1 | v99.57,25.25 99.59,22.35 arc90 v100.33,21.61 | v152.4,21.59 152.4,36.83 arc-90 153.67,38.1 arc90 154.94,39.37 v154.94,46.99 | v151.08,46.97 151.08,46.74 arc-90 150.5,46.15 arc90 148.03,43.69 148.03,43.52
  Bottom 0.254: v92.43,38.68 145.24,38.68 arc-90 v145.92,38
  Bottom 0.305: v65.58,25.93 74.55,25.93 arc-90 74.57,25.91 arc-90 v74.55,25.88 75.06,25.38 99.06,25.38 arc90 v99.57,25.25 | v97.99,34.62 v106.86,34.62 v115.59,34.62 124.33,34.62 arc90 v124.36,34.65 v141.76,34.65 | v100.33,21.61 152.38,21.61 arc-90 v152.4,21.59 | v151.08,46.97 arc-90 151.1,46.99 v154.94,46.99
KEYROW8  (via drill 0.35, 1 pad 1.91)
  Top 0.254: v67.13,45.52 67.11,38.58 arc90 67.41,38.28 arc-90 69.34,36.35 69.34,33.92 arc-90 66.8,31.39 v66.58,31.39 | v94.28,29.13 arc90 92.35,27.2 v92.35,26.7 | v93.4,44.78 93.4,47.88 93.32,47.88 92.2,48.99 37.49,48.99 36.83,49.66 v36.83,53.34
  Top 0.305: K_DEL.P$1 144.18,34.42 arc-90 143.13,33.38 arc90 141.91,32.16 v141.91,25.96 | v83.57,26.75 83.94,26.75 arc-90 K_J.P$1 | K_K.P$1 arc90 92.76,26.7 v92.35,26.7 | K_L.P$1 101.38,25.95 arc-90 v101.37,25.96 | K_SEMI.P$1 110.14,25.95 arc-90 v110.13,25.96 | K_QUOTE.P$1 119.24,25.95 arc-90 v119.23,25.96 | K_RETURN.P$1 127.98,25.95 arc-90 v127.97,25.96
  Bottom 0.254: v67.13,45.52 arc-90 67.26,45.29 84.18,45.29 arc-90 84.53,44.93 arc90 84.68,44.78 v93.4,44.78 | v66.58,31.39 85.53,31.39 arc-90 86.33,30.58 arc90 87.35,29.57 93.85,29.57 arc-90 v94.28,29.13
  Bottom 0.305: v141.91,25.96 v127.97,25.96 v119.23,25.96 v110.13,25.96 v101.37,25.96 arc90 101.27,25.86 100.94,25.86 arc-90 100.61,26.19 arc90 100.1,26.7 v92.35,26.7 83.62,26.7 arc-90 v83.57,26.75
KEYROW9  (via drill 0.35, 1 pad 1.91)
  Top 0.254: v94.72,41.25 arc-90 92.63,43.51 92.63,43.59 92.63,47.99 92.03,48.59 36.75,48.59 35.6,49.75 35.6,53.85 36.32,54.57 37.34,54.57 37.94,53.98 37.97,53.98 38.61,53.34 v39.37,53.34 | v153.24,41.05 arc90 151.36,39.17 151.36,17.68 arc-90 v150.55,16.87
  Top 0.305: K_PIPE.P$1 144.18,25.66 arc-90 143.74,25.22 arc90 143.69,25.17 143.69,20.62 143.33,20.62 arc90 140.79,18.09 140.79,17.02 141.47,17.02 arc90 K_LINE.P$1 140.22,17.06 arc90 v140.18,17.02 | v97.18,17.02 98.29,17.02 arc90 K_<.P$1 | K_>.P$1 arc-90 107.31,17.02 v106.38,17.02 | K_?.P$1 arc-90 116.07,17.02 v114.94,17.02 | K_RSHIFT.P$1 arc-90 124.4,17.02 v123.57,17.02
  Bottom 0.254: v94.72,41.25 153.03,41.25 arc-90 v153.24,41.05 | v150.55,16.87 140.34,16.87 arc-90 v140.18,17.02
  Bottom 0.305: v140.18,17.02 v123.57,17.02 v114.94,17.02 v106.38,17.02 v97.18,17.02

## Text on the board
tPlace: KEY ROW | KEYCOLUM | 0 | 1 | 2 | 3 | 4 | 5 | 6 | 7 | 8 | 9 | 6 | 5 | 4 | 3 | 2 | 1 | 0